# EAGLE board tiny_board (EAGLE 6.2)
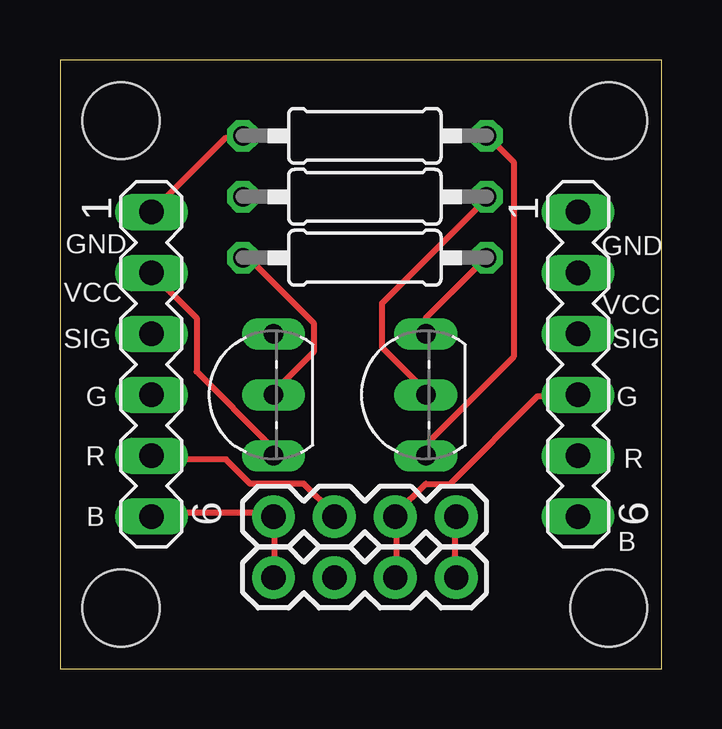
[diagram p0: board, top side]
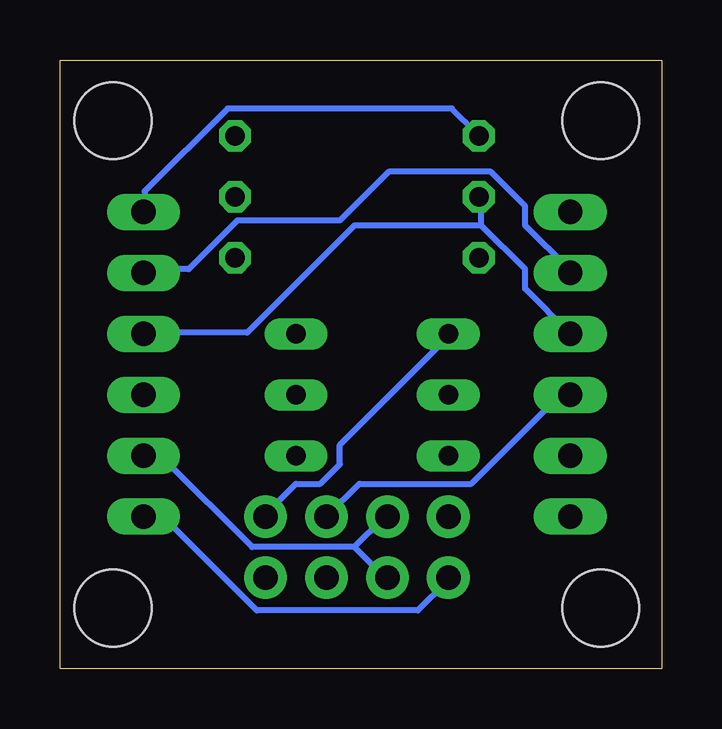
[diagram p1: board, bottom side, seen from below]

Size 25.07 x 25.39 mm. Coordinates in mm from the lower left corner, seen from the top.
Outline: 0,0 25.07,0 25.07,25.39 0,25.39 0,0
Copper layers (1*16): Top 0.035mm / dielectric 1.5mm / Bottom 0.035mm
Design rules: minimum track width 10mil, minimum drill 24mil, track to track 8mil, track to pad 8mil, pad to pad 8mil, via to via 8mil, smd to smd 8mil, copper to edge 40mil, drill to drill 8mil, minimum pad ring 10mil, minimum via ring 8mil, stop-mask expansion 4mil, vias tented up to drill 0mil, thermal gap 10mil
Holes 3.2 mm at 2.54,2.54 2.54,22.86 22.86,2.54 22.86,22.86

## Footprints (pad centres in the part's own frame; a part is rotated, then mirrored left to right if it is on the bottom)
MA06-1 = drill 1.016 long: 1 -6.35,0; 2 -3.81,0; 3 -1.27,0; 4 1.27,0; 5 3.81,0; 6 6.35,0
TO92-EBC-OVAL = drill 0.813 long: B 0,-1.27; C 2.54,-1.27; E -2.54,-1.27
0207/10 = drill 0.813 octagon: 1 -5.08,0; 2 5.08,0
1X04-BIG = drill 1.016 pad 1.778: 1 0,0; 2 2.54,0; 3 5.08,0; 4 7.62,0

## Placement (x,y rotation side)
1  [MA06-1]  3.81,12.7 270 top
2  [MA06-1]  21.59,12.7 270 top
Q1  2N2907  [TO92-EBC-OVAL]  7.62,11.43 90 top
R1  100  [0207/10]  12.7,19.68 0 top
R2  360  [0207/10]  12.7,22.23 180 top
R4  100  [0207/10]  12.7,17.14 180 top
STRIP  1X4-BIG  [1X04-BIG]  16.51,3.81 180 top
STRIP1  1X4-BIG  [1X04-BIG]  16.51,6.35 180 top
T1  2N2222  [TO92-EBC-OVAL]  13.97,11.43 90 top

## Library data of the parts
1 2 = con-lstb; OC_FARNELL: unknown; OC_NEWARK: unknown
Q1 STRIP STRIP1 T1 = adafruit
R1 R2 R4 = resistor

## Nets
BLUESIG: 1.6 2.6 STRIP1.4 STRIP.4
GND: 1.1 2.1 R2.2
GREENSIG: 1.5 2.5 STRIP1.3 STRIP.3
N$4: 1.3 2.3 R1.1
N$5: R2.1 T1.E
N$6: Q1.B R4.2
N$7: R4.1 T1.C
N$8: Q1.C STRIP1.1 STRIP.1
N$11: R1.2 T1.B
REDSIG: 1.4 2.4 STRIP1.2 STRIP.2
VCC: 1.2 2.2 Q1.E

## Tracks (layer width: path | path; a pad name or v marks a point on that pad's centre or on a via)
BLUESIG
  Top 0.254: 1.6 3.86,6.5 8.74,6.5 STRIP1.4 8.94,6.3 8.94,3.86 STRIP.4
  Bottom 0.254: 2.6 21.54,6.3 20.73,6.3 16.87,2.44 10.16,2.44 8.94,3.66 STRIP.4
GND
  Top 0.254: 1.1 6.91,22.15 7.52,22.15 R2.2
  Bottom 0.254: 2.1 21.54,19.1 21.54,19.91 18.09,23.37 8.74,23.37 7.72,22.35 R2.2
GREENSIG
  Top 0.254: 1.5 3.86,8.74 6.91,8.74 7.92,7.72 10.16,7.72 11.38,6.5 STRIP1.3
  Bottom 0.254: 12.8,5.08 17.07,5.08 20.73,8.74 21.54,8.74 2.5 | 12.8,5.08 11.58,6.3 STRIP1.3 | 12.8,5.08 11.58,3.86 STRIP.3
N$4
  Bottom 0.254: 7.52,18.49 7.52,19.51 R1.1 | 7.52,18.49 5.69,16.66 5.69,15.85 1.3 | 7.52,18.49 12.8,18.49 17.27,14.02 21.54,14.02 2.3
N$5
  Top 0.254: T1.E 15.24,9.35 18.9,13.01 18.9,21.13 17.88,22.15 R2.1
N$6
  Top 0.254: Q1.B 8.94,11.58 10.57,13.21 10.57,14.43 7.72,17.27 R4.2
N$7
  Top 0.254: T1.C 15.24,14.63 17.68,17.07 R4.1
N$8
  Top 0.254: STRIP.1 16.46,3.86 16.46,6.3 STRIP1.1
  Bottom 0.254: Q1.C 8.94,13.82 13.41,9.35 13.41,8.53 14.22,7.72 15.24,7.72 16.46,6.5 STRIP1.1
N$11
  Top 0.254: T1.B 15.24,11.58 13.41,13.41 13.41,15.24 17.68,19.51 R1.2
REDSIG
  Top 0.254: 2.4 21.54,11.38 19.91,11.38 16.26,7.72 15.24,7.72 14.02,6.5 STRIP1.2 14.02,6.3 14.02,3.86 STRIP.2
  Bottom 0.254: STRIP1.2 12.6,7.72 7.92,7.72 4.27,11.38 3.86,11.38 1.4
VCC
  Top 0.254: 1.2 5.69,14.63 5.69,12.39 8.74,9.35 8.74,8.94 Q1.E
  Bottom 0.254: 2.2 21.54,16.66 19.71,16.66 17.68,18.69 13.41,18.69 11.38,20.73 7.11,20.73 5.69,19.3 5.69,18.49 3.86,16.66 1.2

## Text on the board
tNames: GND | GND | VCC | VCC | SIG | SIG | G | G | R | R | B | B
tValues: B | R | G | V